# Altium PCB Ultrasonic extern.PcbDoc
Units mm, origin at the board's own origin, x right, y up, seen from the top; angles counter-clockwise.
Board outline 45.59 x 74.3 mm, 2 copper layers (Top Layer, Bottom Layer), stack 1.621 mm thick; 39 components, 52 nets, 175 pads, 7 vias.
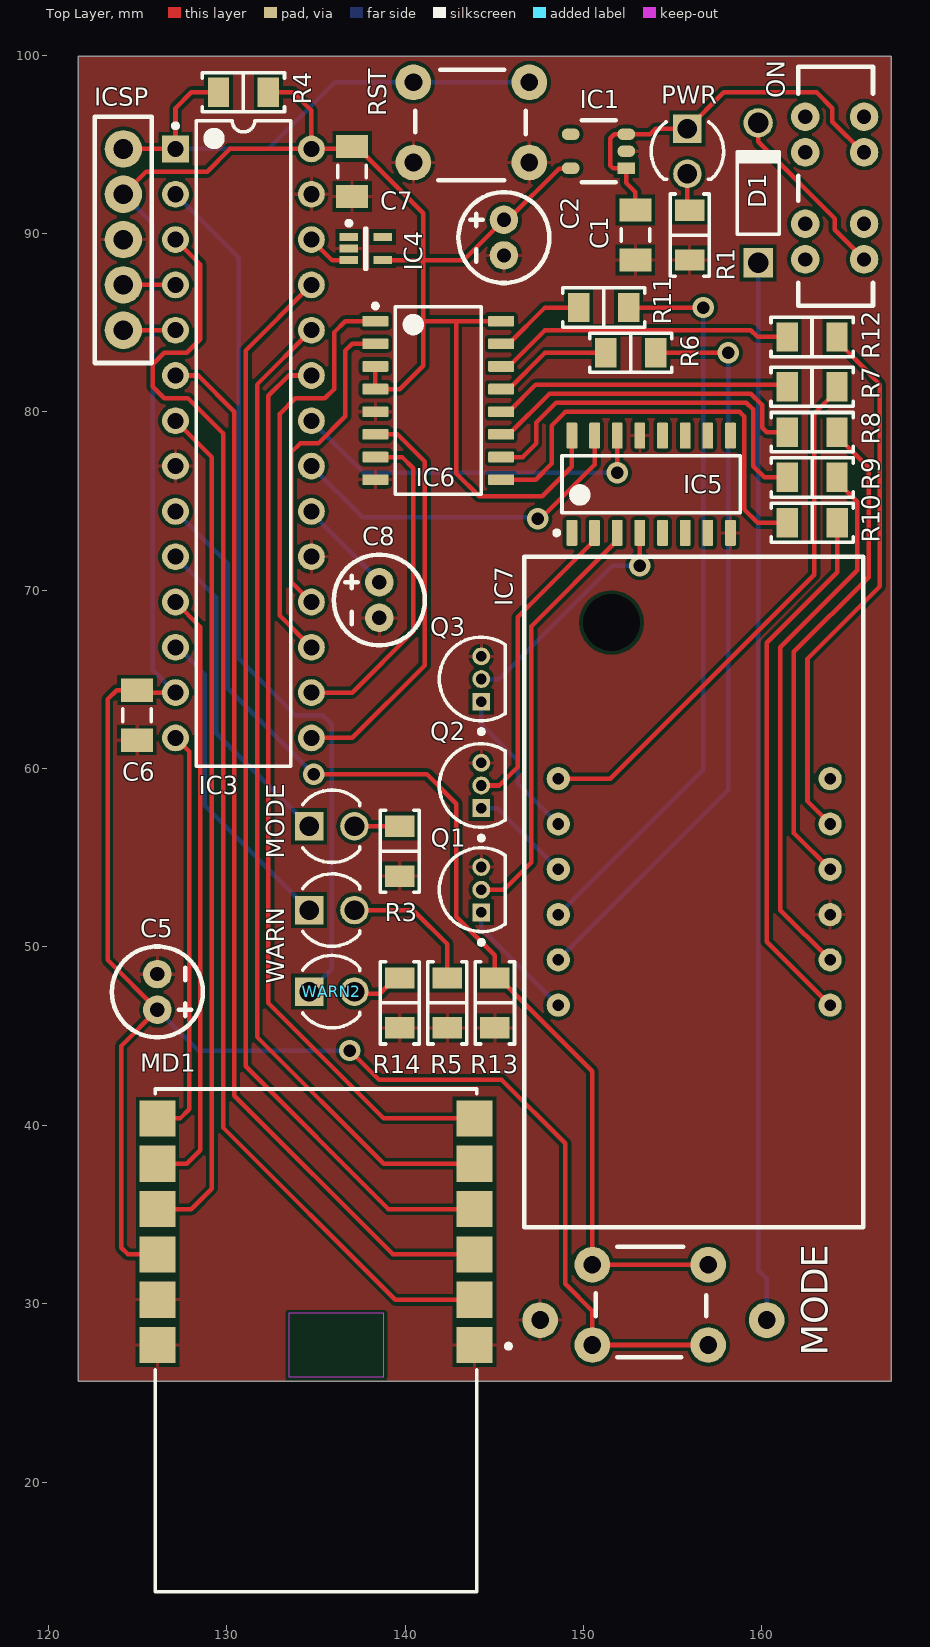
[diagram p0: Top Layer view]
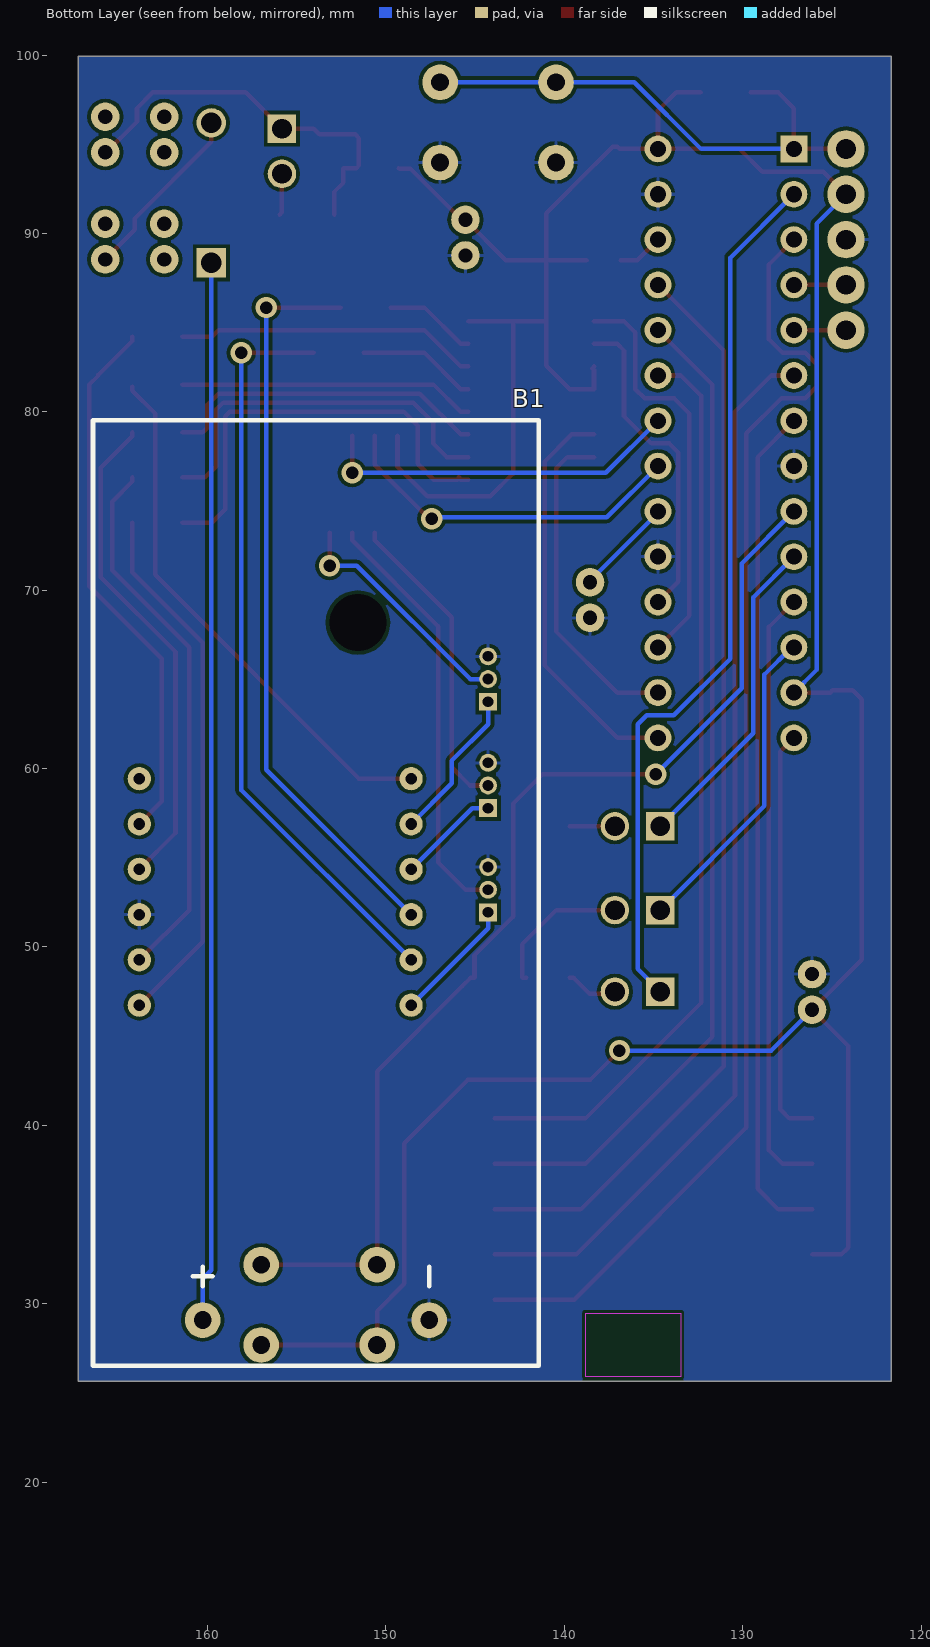
[diagram p1: Bottom Layer view, seen from below]

## Layer stack, top to bottom
Top Solder: solder mask 0.0102, Solder Resist, Dk 3.5
Top Layer: signal copper 0.0356
Dielectric 1: dielectric 1.55, FR-4, Dk 4.8
Bottom Layer: signal copper 0.0356
Bottom Solder: solder mask 0.0102, Solder Resist, Dk 3.5

## Board outline
121.666,25.654 167.259,25.654 167.259,99.949 121.666,99.949

## Design rules (kind name [scope] priority, off if disabled: settings)
BoardOutlineClearance [All] p1 off: gap=0.25 ignorepadtopadclearanceinfootprint=FALSE except(0: Arc-SplitContinuation Track-SplitContinuation SMDPad-SplitContinuation THPad-SplitContinuation Via-SplitContinuation Fill-SplitContinuation Poly-SplitContinuation Region-SplitContinuation Text-SplitContinuation)
Clearance Clearance-xPP-xTP-xTT [All] p1: gap=0.2 ignorepadtopadclearanceinfootprint=FALSE except(0: Arc-Hole Track-Hole SMDPad-Hole THPad-Hole Via-Hole Fill-Hole Poly-Hole Region-Hole Text-Hole; 0.25: Arc-Arc Arc-Track Track-Track)
ComponentClearance [All] p1: gap=0.25 collisioncheckmode=3 verticalgap=0.25 showdistances=FALSE
DiffPairsRouting [All] p1: maxlimit=0.25 minlimit=0.25 mostfreqgap=0.25 toplayer_minwidth=0.381 toplayer_maxwidth=0.381 toplayer_prefwidth=0.381 bottomlayer_minwidth=0.381 bottomlayer_maxwidth=0.381 bottomlayer_prefwidth=0.381 maxuncoupledlength=12.5
Height [All] p1: minheight=0 maxheight=25 prefheight=12.5
HoleSize HoleSize-PTH [All] p1: absolutevalues=TRUE maxlimit=5 minlimit=0.25 maxpercent=80.000 minpercent=20.000
HoleToHoleClearance [All] p1: gap=0.35 allowstackedmicrovias=TRUE
MinimumAnnularRing "Minimum IAR  >0.45mm" [((ObjectKind = 'Pad') OR (ObjectKind = 'Via')) And (Layer = 'MultiLayer') And (HoleDiameter > AsMM(0.45))] p1: minimumring=0.175 // minimum inner annular ring for pads > 0.45mm finished hole size
MinimumAnnularRing "Minimum IAR <=0.45mm" [((ObjectKind = 'Pad') OR (ObjectKind = 'Via')) And (Layer = 'MultiLayer') And (HoleDiameter <= AsMM(0.45))] p2: minimumring=0.175 // minimum inner annular ring for pads <= 0.45mm finished hole size
MinimumSolderMaskSliver [All] p1: minsoldermaskwidth=0.08
PlaneClearance PlaneClearance-IPI [All] p1: clearance=0.25
PlaneConnect [All] p1: planeconnectstyle=Relief reliefexpansion=0.175 reliefentries=4 reliefconductorwidth=0.2 reliefairgap=0.2
PolygonConnect PolygonConnect-xTW [All] p1: connectstyle=Relief reliefconductorwidth=0.2 reliefentries=4 polygonreliefangle="90 Angle" airgapwidth=0.2
RoutingCorners [All] p1: cornerstyle=45-Degree minsetback=2.5 maxsetback=2.5
RoutingVias "RoutingVias > 0.45mm" [(ObjectKind = 'Via') And (HoleDiameter > AsMM(0.45))] p1: holewidth=0.5 width=0.85 viastyle="Through Hole" minholewidth=0.5 minwidth=0.85 maxholewidth=0.9 maxwidth=1.25 // finishet hole size > 0.45mm
RoutingVias "RoutingVias <= 0.45mm" [(ObjectKind = 'Via') And (HoleDiameter <= AsMM(0.45))] p2: holewidth=0.3 width=0.65 viastyle="Through Hole" minholewidth=0.25 minwidth=0.6 maxholewidth=0.45 maxwidth=0.8 // finishet hole size <= 0.45mm
SilkToSilkClearance [All] p1: silktosilkclearance=0.2
SilkToSolderMaskClearance SilkscreenOverComponentPads [IsPad] p1: minsilkscreentomaskgap=0.1 clearancetoexposedcopper=TRUE
SolderMaskExpansion [All] p1: expansion=0 istentingtop=FALSE
UnRoutedNet [All] p1: checkbadconnections=TRUE
Width Width-xTW [All] p1: maxlimit=1.5 minlimit=0.15 preferedwidth=0.2
18 further rules are at their usual default settings.

## Components (designator, comment, footprint, x,y, rotation, side; value= is the part's Value field where it differs from the comment)
B1 "BAT" MP000342 147.574,29.083 r270 bottom
C1 "1uF" 1206 152.908,89.916 r270 top
C2 "100uF" "THT CAP POL 5mm" 145.542,90.773 r270 top
C5 "10uF" "THT CAP POL 5mm" 126.111,46.482 r90 top
C6 "0.1uF" 1206 124.968,62.992 r90 top
C7 "0.1uF" 1206 137.033,93.472 r90 top
C8 "10uF" "THT CAP POL 5mm" 138.557,70.453 r270 top
D1 "1N5817" DIOD-DO-41-P-2 159.79,92.28 r90 top
IC1 "MIC5365-3.3YD5-TR" TSOT-23-5 152.4,93.665 r180 top
IC3 "PIC24FJ64GA002-I/SP" SPDIP300-SP28 130.937,78.232 r0 top
IC4 "MCP9700T-E/LT" SC70-LT5_M 137.795,89.154 r0 top
IC5 "CD4017BM" D0016A_N 153.797,75.946 r90 top
IC6 "CD4511BNSR" NS0016A_L 141.859,80.645 r0 top
IC7 "LT0565SRWK" "7 segment LED display" 163.83,46.736 r90 top
ICSP "ICSP" "5 PIN CON" 124.206,94.742 r270 top (schematic designator J1)
MD1 "MRF89XAM8A-I/RM" FP-MRF89XAM8A-I-RM-0 135.001,27.94 r180 top
MODE "MODE" FSM4JH 150.495,32.186 r0 top (schematic designator SW3)
MODE "MODE" LED-2P-2.54-3MM_V 135.89,56.769 r0 top (schematic designator LED2)
ON "ON-OFF" STSSS2232 162.433,88.551 r90 top (schematic designator SW1)
PWR "PWR" LED-2P-2.54-3MM_V 155.829,94.615 r270 top (schematic designator LED1)
Q1 "BC548CG" ONSC-TO-92-3-29-11 144.272,53.213 r90 top
Q2 "BC548CG" ONSC-TO-92-3-29-11 144.272,59.055 r90 top
Q3 "BC548CG" ONSC-TO-92-3-29-11 144.272,65.024 r90 top
R1 "100" "RES 1206_3216" 155.956,89.916 r90 top value="470 Ohms"
R3 "100" "RES 1206_3216" 139.7,55.372 r90 top value="470 Ohms"
R4 "10k" "RES 1206_3216" 130.937,97.917 r0 top value="10 kOhms"
R5 "100" "RES 1206_3216" 142.367,46.863 r90 top value="470 Ohms"
R6 "100" "RES 1206_3216" 152.654,83.312 r180 top value="470 Ohms"
R7 "100" "RES 1206_3216" 162.814,81.407 r180 top value="470 Ohms"
R8 "100" "RES 1206_3216" 162.817,78.867 r180 top value="470 Ohms"
R9 "100" "RES 1206_3216" 162.817,76.327 r180 top value="470 Ohms"
R10 "100" "RES 1206_3216" 162.82,73.787 r180 top value="470 Ohms"
R11 "100" "RES 1206_3216" 151.13,85.852 r180 top value="470 Ohms"
R12 "100" "RES 1206_3216" 162.814,84.201 r180 top value="470 Ohms"
R13 "1k" "RES 1206_3216" 145.034,46.863 r90 top value="470 Ohms"
R14 "100" "RES 1206_3216" 139.7,46.863 r90 top value="470 Ohms"
RST "RESET" FSM4JH 146.962,93.98 r180 top (schematic designator SW2)
WARN "WARN" LED-2P-2.54-3MM_V 135.89,52.07 r0 top (schematic designator LED3)
WARN2 "WARN" LED-2P-2.54-3MM_V 135.89,47.498 r0 top (schematic designator LED4)

## Footprints (in the part's own frame and the unit in brackets; to place one, negate y for a bottom-side part, rotate by r counter-clockwise, add the part's x,y. Pads: shape width x height; smd on the part's side, far side on the other; paste and mask are expansions set on the pad)
"5 PIN CON" [mm]
  round 2.1 hole 1.1 mask+0.102: 1(0,0) 2(2.54,0) 3(5.08,0) 4(7.62,0) 5(10.16,0)
  silkscreen extent -1.8,-1.6 12,1.6, body extent -1.2,-1.2 11.36,1.2, height 5.5
"7 segment LED display" [mm] "3 digits"
  round 1.3 hole 0.65 mask+0.102: 1(0,0) 2(2.54,0) 3(5.08,0) 4(7.62,0) 5(10.16,0) 6(12.7,0) 7(12.7,15.24) 8(10.16,15.24) 9(7.62,15.24) 10(5.08,15.24) 11(2.54,15.24) 12(0,15.24)
  silkscreen extent -12.45,-1.85 25.15,17.15, body extent -12.55,-1.95 25.25,17.25, height 8.5
1206 [mm] "Chip Resistor, 2-Leads, Body 3.20x1.60mm, IPC Medium Density"
  rect 1.3x1.8 smd: 1(-1.4,0) 2(1.4,0)
  silkscreen extent -0.35,-0.8 0.35,0.8, body extent -1.7,-0.9 1.7,0.9, height 0.9
D0016A_N [mm] "SOIC, 16-Leads, Body 10x4mm, Pitch 1.27mm, IPC Medium Density"
  rrect17% 1.45x0.6 smd: 1(-2.725,4.445) 2(-2.725,3.175) 3(-2.725,1.905) 4(-2.725,0.635) 5(-2.725,-0.635) 6(-2.725,-1.905) 7(-2.725,-3.175) 8(-2.725,-4.445) 9(2.725,-4.445) 10(2.725,-3.175) 11(2.725,-1.905) 12(2.725,-0.635) 13(2.725,0.635) 14(2.725,1.905) 15(2.725,3.175) 16(2.725,4.445)
  silkscreen extent -2.85,-5 1.6,5.42, body extent -3,-4.95 3,4.95, height 1.59
DIOD-DO-41-P-2 [mm] "THD, 2-Leads, Body 4.635x2.36mm, Pin Spacing 7.85mm"
  rect 1.65x1.65 hole 1.15: 1(-3.925,0)
  round 1.65 hole 1.15: 2(3.925,0)
  silkscreen extent -2.32,-1.18 2.32,1.18, body extent -4.36,-1.18 4.36,1.18, height 2.35
FP-MRF89XAM8A-I-RM-0 [mil]
  rect 80x80 smd paste+0 mask+0: 1(-350,10) 2(-350,-90) 3(-350,-190) 4(-350,-290) 5(-350,-390) 6(-350,-490) 7(350,-490) 8(350,-390) 9(350,-290) 10(350,-190) 11(350,-90) 12(350,10)
  Keep-Out Layer region: -150,-60 60,-60 60,80 -150,80
  silkscreen extent -430,-555 355,555, body extent -394,-559 394,559, height 10
FSM4JH [mm] "Tactile switch"
  round 2 hole 1: 1(0,0) 2(6.5,0) 3(0,-4.5) 4(6.5,-4.5)
  silkscreen extent 0.2,-5.2 6.4,1, body extent 0.3,-5.1 6.3,0.9, height 5.5
LED-2P-2.54-3MM_V [mm] "LED, 2-Leads, Dia 3mm, Pitch 2.54mm"
  rect 1.6x1.6 hole 1.1: 1(-1.27,0)
  round 1.6 hole 1.1: 2(1.27,0)
  silkscreen extent -1.64,-2.03 1.57,2.03, body extent -2.06,-2.07 1.6,2.07, height 6.35
MP000342 [mm] "Battery holder 2xAAA"
  round 2 hole 1 mask+0.102: 1(0,0) 2(0,-12.7)
  round 0 hole 3.2 unplated mask+0.102: 3(-39.1,-4)
  silkscreen extent -50.45,-18.85 2.55,6.15, body extent -50,-18.5 2,5.5, height 12
NS0016A_L [mm] "SOIC,16-Leads,Body 10.5x5.6mm,Pitch 1.27mm,IPC High Density"
  rrect17% 1.45x0.6 smd: 1(-3.525,4.445) 2(-3.525,3.175) 3(-3.525,1.905) 4(-3.525,0.635) 5(-3.525,-0.635) 6(-3.525,-1.905) 7(-3.525,-3.175) 8(-3.525,-4.445) 9(3.525,-4.445) 10(3.525,-3.175) 11(3.525,-1.905) 12(3.525,-0.635) 13(3.525,0.635) 14(3.525,1.905) 15(3.525,3.175) 16(3.525,4.445)
  silkscreen extent -3.65,-5.25 2.4,5.42, body extent -2.8,-5.25 2.8,5.25, height 2
ONSC-TO-92-3-29-11 [mm] "TO, 3-Leads, Body Dia 4.7mm, Pitch 1.27mm"
  rect 1x1 hole 0.6: 1(-1.27,0)
  round 1 hole 0.6: 2(0,0) 3(1.27,0)
  silkscreen extent -3.07,-1.34 2.35,2.35, body extent -2.35,-1.33 2.36,2.36, height 7.87
"RES 1206_3216" [mm] "Chip Resistor, 2-Leads, Body 3.13x1.55mm, IPC Medium Density"
  rect 1.2x1.65 smd: 1(-1.4,0) 2(1.4,0)
  silkscreen extent -2.3,-1.1 2.3,1.1, body extent -1.57,-0.8 1.62,0.8, height 0.6
SC70-LT5_M [mm] "SOT353, 5-Leads, Body 2x1.3mm, Pitch 0.65mm, Lead Span 2.1mm, IPC Low Density"
  rect 1.05x0.45 smd: 1(-0.95,0.65) 2(-0.95,0) 3(-0.95,-0.65) 4(0.95,-0.65) 5(0.95,0.65)
  silkscreen extent -1.07,-1.15 0.05,1.55, body extent -0.67,-1.12 0.68,1.13, height 1.1
SPDIP300-SP28 [mm] "DIP, 28-Pin, Row Spacing 7.62 mm, Pitch 2.54 mm"
  rect 1.5x1.5 hole 0.9: 1(-3.81,16.51)
  round 1.5 hole 0.9: 2(-3.81,13.97) 3(-3.81,11.43) 4(-3.81,8.89) 5(-3.81,6.35) 6(-3.81,3.81) 7(-3.81,1.27) 8(-3.81,-1.27) 9(-3.81,-3.81) 10(-3.81,-6.35) 11(-3.81,-8.89) 12(-3.81,-11.43) 13(-3.81,-13.97) 14(-3.81,-16.51) 15(3.81,-16.51) 16(3.81,-13.97) 17(3.81,-11.43) 18(3.81,-8.89) 19(3.81,-6.35) 20(3.81,-3.81) 21(3.81,-1.27) 22(3.81,1.27) 23(3.81,3.81) 24(3.81,6.35) 25(3.81,8.89) 26(3.81,11.43) 27(3.81,13.97) 28(3.81,16.51)
  silkscreen extent -3.93,-18.1 2.65,18.1, body extent -3.55,-18.1 3.55,18.1, height 5.33
STSSS2232 [mm] "Slide switch 3POS"
  round 1.6 hole 0.8 mask+0.102: 1(0,-3.3) 2(2,-3.3) 3(6,-3.3) 4(8,-3.3) 5(0,0) 6(2,0) 7(6,0) 8(8,0)
  silkscreen extent -2.6,-3.8 10.8,0.4, body extent -2.4,-5.4 10.6,0.3, height 3.5
"THT CAP POL 5mm" [mm]
  round 1.6 hole 0.8 mask+0.102: 1(0,0) 2(2,0)
  silkscreen extent -1.55,-2.55 3.55,2.55, body extent -1.5,-2.5 3.5,2.5, height 8.5
TSOT-23-5 [mm]
  rect 1x0.66 smd: 1(0,0)
  oval 1x0.66 smd: 2(0,-0.95) 3(0,-1.9) 4(3.115,-1.9) 5(3.115,0)
  silkscreen extent 0.6,-2.7 2.5,0.8, body extent 0.65,-2.4 2.45,0.5, height 1

## Part data
B1: "Battery holder 3xAAA"
C1 C6 C7: library part CAP, "Capacitor ceramic"
C2 C5 C8: library part "CAP POL", "aluminium electrolytic capacitor"
D1: library part CMP-2000-05521-1, "Schottky Barrier Rectifier, 1 A, 20 V, -65 to 125 degC, 2-Pin DO-41, RoHS, Tape and Reel", If - Forward Current=1A, Ifsm - Forward Surge Current=25A, Ir - Reverse Current=1000uA, Manufacturer=DiodesIncorporated, Maximum Operating Temperature=+125C, Minimum Operating Temperature=-65C, Operating Temperature Range=-65Cto+125C, Package / Case=DO-41, Package Description="2-Pin Through Hole Device, Body 4.635 x 2.36 mm, Pin Spacing 7.85 mm", Package Reference=DO-41-P-2, Vf - Forward Voltage=0.75Vat3A, Vrrm - Repetitive Reverse Voltage=20V, Brand=DiodesIncorporated, Configuration=Single, Datasheet URL=http://www.diodes.com/_files/datasheets/ds23001.pdf, Datasheet Version="Rev. 8-2, 05/2009", Factory Pack Quantity=5000, Height=2.72mm, Length=5.21mm, Manufacturer URL=http://www.diodes.com/, Mounting Style=ThroughHole, Mounting Technology=ThroughHole, Packaging=Reel, Product=SchottkyRectifiers, Product Category=SchottkyDiodes&Rectifiers, RoHS=True, Series=1N58, Technology=Si, Termination Style=ThroughHole, Type=SchottkyDiode, Unit Weight=0.010582oz, Width=2.72mm
IC1: "LDO Voltage regulator 2.5V-5.5V in 3.3V out"
IC3: library part CMP-0046-00003-2, "General Purpose 16-Bit Flash Microcontroller, 64KB Flash, 8KB SRAM, 28-Pin SPDIP, Industrial Temperature", ComponentLink1Description=Datasheet, ComponentLink1URL=http://ww1.microchip.com/downloads/en/DeviceDoc/39881D.pdf, ComponentLink2Description="Packaging Specification", ComponentLink2URL=http://www.microchip.com/stellent/groups/techpub_sg/documents/packagingspec/en012702.pdf, ComponentLink3Description="Microchip.com Home", ComponentLink3URL=http://www.microchip.com/, DatasheetVersion="revD, Feb-2010", PackageDescription="28-Lead Skinny Plastic Dual In-Line (SP) - 300 mil Body [SPDIP]", PackageReference=SPDIP300-SP28, PackageVersion="revBB, Aug-2009", RevisionNote="Component URLs added."
IC4: library part CMP-0192-00174-1, "Low-Power Linear Active Thermistor IC, 5-Pin SC-70, Extended Temperature, Tape and Reel", Code_IPC=SOT353-5, DatasheetVersion="revE, Apr-2009", PackageDescription="5-Lead Plastic Small Outline Transistor (LT) [SC70]", PackageReference=SC70-LT5, PackageVersion="revBB, Aug-2009"
IC5: library part CMP-1623-00071-2, "CMOS Decade Counter with 10 Decoded Outputs, D0016A, TUBE", F @ Nom Voltage(Max)(Mhz)=8, Generic Part Number=CD4017B, ICC @ Nom Voltage(Max)(mA)=0.03, Manufacturer="Texas Instruments", Operating Temperature Range(C)="-55 to 125", Rating=Military, tpd @ Nom Voltage(Max)(ns)=270, Voltage(Nom)(V)=10, Bits(#)=10, Code_JEDEC="MS-012 variation AC", DatasheetVersion=SCHS027C, Function=Counter, Input Type=CMOS, Inputs=1, Output Drive (IOL/IOH)(Max)(mA)=1.5/-1.5, Output Type=CMOS, PackageReference=D0016A, Schmitt Trigger=No, Technology Family=CD4000, Type=Decade, VCC(Max)(V)=18, VCC(Min)(V)=3
IC6: library part CMP-0388-00338-2, "CMOS BCD-to-7-Segment LED Latch / Decoder / Driver, 3 to 18 V, -55 to 125 degC, 16-pin SOP (NS16), Green (RoHS & no Sb/Br)", Manufacturer="Texas Instruments", Rating=Military, ComponentLink1Description="Manufacturer URL", ComponentLink1URL=http://www.ti.com/, ComponentLink2Description=Datasheet, ComponentLink2URL=http://www.ti.com/general/docs/lit/getliterature.tsp?genericPartNumber=CD4511B&fileType=pdf, ComponentLink3Description="Package Specification", ComponentLink3URL=http://www.ti.com/litv/pdf/msop002a, DatasheetVersion=SCHS072B, Eco-Plan="Green (RoHS & no Sb/Br)", Mounting Technology="Surface Mount", PackageDescription="16-Pin Plastic Small Outline, Body 10.20 x 5.30 mm, Pitch 1.27 mm", PackageReference=NS0016A, PackageVersion=4040062/C, PartNumber=CD4511BNSR, SubFamily="Discrete Segment LED Driver", Vin(Max)(V)=18, Vin(Min)(V)=3
IC7: "7 segment LED red display, 3 digit, common cathode, 2.5V forward, 20mA"
ICSP: library part "5 PIN CON", "ICSP programming pins"
MD1: library part CMP-06331-000001-1, "RF TXRX MOD ISM<1GHZ TRACE ANT", Ambient Temperature Range High=+85°C, Ambient Temperature Range Low=-40°C, Manufacturer=Microchip, Max Frequency=870MHz, Max Supply Voltage=3.6V, Min Supply Voltage=2.1V, Nominal Supply Current=1.3mA, Receiving Current=3mA, Temperature="-40°C to +85°C", Transmitting Current=25mA, Automotive=No, Bandwidth=7MHz, Category=UNK, ComponentLink2Description=Datasheet, ComponentLink2URL=http://ww1.microchip.com/downloads/en/DeviceDoc/70651A.pdf, Data Rate=40kbits/s, Device Class L1="Integrated Circuits (ICs)", Device Class L2="RF Semiconductors and Devices", Device Class L3=Transceivers, Digikey Description="RF TXRX MOD ISM<1GHZ TRACE ANT", Height=0.075inch, Interface=SPI, Lead Free=Yes, Manufacturer Part Number=MRF89XAM8A-I/RM, Mouser Description="RF Modules 868MHz Sub-GHz transceiver module", Octopart=https://octopart.com/mrf89xam8a-i%2Frm-microchip-18902547, Package=MRF89XAM8A-I/RM, RoHS=TRUE, Temperature Range High=+85°C, Temperature Range Low=-40°C
MODE RST: library part SW_TACT, "TACT SW, 50mA, 24V"
MODE PWR: library part CMP-2000-05186-1, "Green Diffused LED, 2.1 V, 20 mA forward, -40 to 85 degC, 2-Pin THD, RoHS", Color=Green, Dominant Wavelength/Color Temperature=569nm, Manufacturer=Avago, Package=2T-1, Category=LEDs, Datasheet URL=https://datasheet.ciiva.com/11773/0900766b800204ad-11773539.pdf, Datasheet Version=Jul-14, Intensity=2.3mcd, Lens Appearance=ColoredDiffused, Lens Shape Type=Circular, Manufacturer URL=http://www.avagotech.com/, Mounting=ThroughHole, Mounting Orientation=TopMount, Number of LEDs=1, Packaging=Bulk, Peak Wavelength=565nm, Pin Count=2, Rad Hard=No, Type=Uni-Color, Viewing Angle=50deg
ON: library part STSSS2232, "Sliding switch, 3-POS  DP3T, 3 A, 18 V"
Q1 Q2 Q3: library part CMP-1048-01453-1, "Amplifier Transistor, NPN Silicon, 3-Pin TO-92, Pb-Free, Bulk Box", Manufacturer="On Semiconductor", ComponentLink1Description="Manufacturer URL", ComponentLink1URL=http://www.onsemi.com/, ComponentLink2Description=Datasheet, ComponentLink2URL=http://www.onsemi.com/pub_link/Collateral/BC546-D.PDF, ComponentLink3Description="Package Specification", ComponentLink3URL=http://www.onsemi.cn/pub_link/Collateral/2N6426-D.PDF, DatasheetVersion="Rev. 7", fT Min (MHz)=150, IC Continuous (A)=0.1, Mounting Technology="Through Hole", PackageDescription="3-Pin Transistor Outline, Body 4.825 x 3.685 mm, Pitch 1.27 mm", PackageReference=TO-92-3-29-11_AM_SL, PackageVersion="Rev. AM", Packing="Bulk Box", PartNumber=BC548CG, Polarity=NPN, RoHS=TRUE
R1 R3 R5 R6 R7 R8 R9 R10 R11 R12 R13 R14: library part CRG1206F470R, "RES SMD 470 OHM 1% 1/4W 1206", Device Package="1206 (3216 Metric)", Manufacturer="TE Connectivity Passive Product", Operating Temperature="-55°C ~ 155°C", Power (Watts)="0.25W, 1/4W", Resistance="470 Ohms", Supplier Device Package=1206, Supplier Part Number 1=A106077CT-ND, Temperature Coefficient=±100ppm/°C, Tolerance=±1%, ComponentLink1Description=Datasheet, ComponentLink1URL=https://www.te.com/commerce/DocumentDelivery/DDEController?Action=srchrtrv&DocNm=1773204&DocType=DS&DocLang=English, ComponentLink2Description="DigiKey Link", ComponentLink2URL=http://digikey.com/product-detail/en/te-connectivity-passive-product/CRG1206F470R/A106077CT-ND/3477734, Composition="Thick Film", Height - Seated (Max)="0.026\" (0.65mm)", LastUpdated="2020-09-02 01:13:10", Lifecycle Status=Active, Minimum Order=1, Number of Terminations=2, Package / Case="1206 (3216 Metric)", Packaging=TapeAndReel, Part Number=CRG1206F470R, Part Status=Active, PartId=26990, Price=0.01, Series="CRG, Neohm", Size / Dimension="0.122\" L x 0.061\" W (3.10mm x 1.55mm)", Supplier 1=DigiKey
R4: library part CRG1206F10K, "RES SMD 10K OHM 1% 1/4W 1206", Device Package="1206 (3216 Metric)", Manufacturer="TE Connectivity Passive Product", Operating Temperature="-55°C ~ 155°C", Power (Watts)="0.25W, 1/4W", Resistance="10 kOhms", Supplier Device Package=1206, Supplier Part Number 1=A106069CT-ND, Temperature Coefficient=±100ppm/°C, Tolerance=±1%, ComponentLink1Description=Datasheet, ComponentLink1URL=https://www.te.com/commerce/DocumentDelivery/DDEController?Action=srchrtrv&DocNm=1773204&DocType=DS&DocLang=English, ComponentLink2Description="DigiKey Link", ComponentLink2URL=http://digikey.com/product-detail/en/te-connectivity-passive-product/CRG1206F10K/A106069CT-ND/3477720, Composition="Thick Film", Height - Seated (Max)="0.026\" (0.65mm)", LastUpdated="2020-09-02 01:13:10", Lifecycle Status=Active, Minimum Order=1, Number of Terminations=2, Package / Case="1206 (3216 Metric)", Packaging=TapeAndReel, Part Number=CRG1206F10K, Part Status=Active, PartId=26989, Price=0.01, Series="CRG, Neohm", Size / Dimension="0.122\" L x 0.061\" W (3.10mm x 1.55mm)", Supplier 1=DigiKey
WARN WARN2: library part CMP-2000-05186-1, "Red Diffused LED, 2.1 V, 20 mA forward, -40 to 85 degC, 2-Pin THD, RoHS", Color=Green, Dominant Wavelength/Color Temperature=569nm, Manufacturer=Avago, Package=2T-1, Category=LEDs, Datasheet URL=https://datasheet.ciiva.com/11773/0900766b800204ad-11773539.pdf, Datasheet Version=Jul-14, Intensity=2.3mcd, Lens Appearance=ColoredDiffused, Lens Shape Type=Circular, Manufacturer URL=http://www.avagotech.com/, Mounting=ThroughHole, Mounting Orientation=TopMount, Number of LEDs=1, Packaging=Bulk, Peak Wavelength=565nm, Pin Count=2, Rad Hard=No, Type=Uni-Color, Viewing Angle=50deg

## Via types
v1: diameter 1.2, hole 0.7, Top Layer to Bottom Layer, 7 vias

## Nets (pads, with @x,y where several pads share a name; then routed paths per layer and width w, separated by ;. In a path a pad name is that pad's centre, name@x,y a point inside that pad or via, vN(x,y) a via of type N, cw(c..) or ccw(c..) an arc to the next point about the centre after c; other vN are vias at no path point)
3V3: C2.1 C5.1 C6.2 C7.2 IC1.5 IC3.13 IC3.28 IC4.4 IC5.16 IC6.3 IC6.4 IC6.16 ICSP.2 MD1.10 MODE.3 MODE.4 R4.2 | length 185.4
  Top Layer w0.254: ICSP.2 125.476,93.472 128.905,93.472 130.175,94.742 IC3.28 ; MD1.10 124.46,32.766 124.079,33.147 124.079,44.45 C5.1 123.317,49.276 123.317,63.881 123.828,64.392 C6.2 125.098,64.262 IC3.13 IC3.13@127.254,64.262 ; R4.2 133.731,97.917 134.747,96.901 IC3.28 ; v1(136.906,44.196) 138.557,42.545 145.415,42.545 148.971,38.989 148.971,31.115 150.495,29.591 MODE.3 MODE.4 ; 138.302,93.853 137.283,94.872 C7.2 136.903,94.742 IC3.28 ; 138.303,93.853 141.009,91.147 141.009,88.504 ; IC6.3 138.334,82.519 138.43,82.423 138.38,82.423 138.334,82.377 IC6.4 139.7,81.28 141.009,82.589 141.009,85.09 ; IC4.4 141.009,88.504 ; IC6.16 142.875,85.09 ; IC1.5 149.266,93.646 148.637,93.646 145.764,90.773 C2.1 143.273,88.504 141.009,88.504 ; IC5.16 149.352,76.932 147.69,75.27 144.15,75.27 142.875,76.545 142.875,85.09 ; 141.009,85.09 142.875,85.09 ; 141.009,85.09 141.009,88.504
  Bottom Layer w0.254: ICSP.2 125.857,90.551 125.857,65.532 IC3.13 ; C5.1 128.397,44.196 v1(136.906,44.196) ; IC3.28@134.62,94.742 IC3.28
"7SEG RST": IC3.21 IC5.15 | length 20
  Top Layer w0.254: v1(147.44,74.02) 147.6,74.02 150.622,77.042 IC5.15
  Bottom Layer w0.254: IC3.21 137.619,74.09 147.37,74.09 v1(147.44,74.02)
a: IC6.13 R6.2 | length 6.7
  Top Layer w0.254: IC6.13 145.809,81.28 147.841,83.312 R6.2
b: IC6.12 R7.2 | length 16.7
  Top Layer w0.254: IC6.12 145.809,80.01 147.333,81.534 R7.2@161.414,81.534
c: IC6.11 R8.2 | length 18.6
  Top Layer w0.254: IC6.11 145.809,78.74 148.095,81.026 159.385,81.026 160.02,80.391 160.02,79.121 160.274,78.867 R8.2
"CNTR CLK": IC3.22 IC5.14 | length 20.4
  Top Layer w0.254: v1(151.892,76.581) IC5.14
  Bottom Layer w0.254: IC3.22 137.668,76.581 v1(151.892,76.581)
d: IC6.10 R9.2 | length 21.6
  Top Layer w0.254: IC6.10 146.59,77.47 147.35,78.23 147.35,79.405 148.463,80.518 159.132,80.518 159.512,80.138 159.512,76.962 160.147,76.327 R9.2
e: IC6.9 R10.2 | length 24.6
  Top Layer w0.254: IC6.9 145.796,76.2 145.923,76.327 145.923,76.259 145.982,76.2 147.32,76.2 148.209,77.089 148.209,79.229 148.99,80.01 158.75,80.01 159.004,79.756 159.004,74.549 159.766,73.787 R10.2
f: IC6.15 R11.2 | length 5.2
  Top Layer w0.254: IC6.15 145.809,83.82 147.841,85.852 R11.2
g: IC6.14 R12.2 | length 17
  Top Layer w0.254: IC6.14 145.809,82.55 147.841,84.582 159.385,84.582 159.766,84.201 R12.2
GND: B1.1 C1.2 C2.2 C5.2 C6.1 C7.1 C8.2 IC1.2 IC3.8 IC3.19 IC3.27 IC4.2 IC5.8 IC5.13 IC6.5 IC6.8 IC7.3 ICSP.3 MD1.1 MD1.11 MD1.12 Q1.3 Q2.3 Q3.3 R1.1 R3.1 R5.1 R13.1 R14.1 RST.1 RST.2
"LED A": IC3.16 IC6.7 | length 18.7
  Top Layer w0.254: IC3.16 137.033,64.262 140.462,67.691 140.462,76.835 139.827,77.47 IC6.7
"LED B": IC3.17 IC6.1 | length 23.2
  Top Layer w0.254: IC3.17 132.983,68.566 132.983,79.897 133.847,80.761 135.498,80.761 136.017,81.28 136.017,84.455 136.652,85.09 IC6.1
"LED C": IC3.18 IC6.2 | length 18.3
  Top Layer w0.254: IC3.18 133.604,70.485 133.604,77.724 134.112,78.232 135.128,78.232 136.652,79.756 136.652,83.439 137.033,83.82 IC6.2
"LED D": IC3.15 IC6.6 | length 22.9
  Top Layer w0.254: IC3.15 137.033,61.722 141.097,65.786 141.097,77.216 139.573,78.74 IC6.6
MCLR: IC3.1 ICSP.1 R4.1 RST.3 RST.4 | length 29.4
  Top Layer w0.254: ICSP.1 IC3.1 127.127,97.028 128.016,97.917 R4.1
  Bottom Layer w0.254: IC3.1 132.334,94.742 136.072,98.48 RST.4 RST.3
MISO: IC3.14 MD1.7 | length 23.1
  Top Layer w0.254: MD1.7 127.381,40.386 127.889,40.894 127.889,60.96 IC3.14
MOSI: IC3.24 MD1.5 | length 56
  Top Layer w0.254: IC3.24 131.699,81.534 131.699,44.958 138.811,37.846 MD1.5
nCS: IC3.11 MD1.8 | length 34
  Top Layer w0.254: MD1.8 127.762,37.846 128.524,38.608 128.524,67.945 IC3.11
nCSCON: IC3.6 MD1.3 | length 59.6
  Top Layer w0.254: IC3.6 128.397,82.042 130.429,80.01 130.429,41.656 139.319,32.766 MD1.3
NetB1_2: B1.2 D1.1 | length 59.7
  Bottom Layer w0.254: D1.1@159.79,88.594 159.79,31.88 160.274,31.396 B1.2
NetC1_1: C1.1 IC1.1 IC1.3 ON.3 PWR.1 | length 22.4
  Top Layer w0.254: C1.1@152.908,91.062 152.908,92.329 152.4,92.837 IC1.1 151.66,93.665 151.511,93.814 151.511,95.346 151.73,95.565 IC1.3 153.731,95.565 154.051,95.885 PWR.1 157.861,97.917 163.068,97.917 163.957,97.028 163.957,96.266 165.672,94.551 ON.3
NetC8_1: C8.1 IC3.20 | length 5.7
  Top Layer w0.254: IC3.20@134.747,74.343 IC3.20 ; C8.1@138.43,70.58 C8.1 C8.1@138.557,70.533
  Bottom Layer w0.254: IC3.20@134.747,74.343 C8.1@138.557,70.533
NetD1_2: D1.2 ON.1 | length 10.1
  Top Layer w0.254: D1.2 159.79,95.14 164.09,90.84 164.09,90.21 165.733,88.567 ON.1
NetIC3_2: IC3.2 WARN2.1 | length 49.8
  Bottom Layer w0.254: IC3.2 130.683,88.646 130.683,66.167 133.858,62.992 135.382,62.992 135.89,62.484 135.89,48.768 WARN2.1
NetIC3_9: IC3.9 MODE.1@150.495,32.186 MODE.2@156.995,32.186 R13.2 | length 62.3
  Top Layer w0.254: v1(134.874,59.69) 141.224,59.69 142.875,58.039 142.875,51.689 145.034,49.53 R13.2 145.259,48.263 145.732,47.79 150.495,43.027 150.495,32.186 MODE.2@156.995,32.186
  Bottom Layer w0.254: IC3.9 130.048,71.501 130.048,64.516 v1(134.874,59.69)
NetIC3_10: IC3.10 MODE.1@134.62,56.769 | length 18.2
  Bottom Layer w0.254: IC3.10 129.413,69.596 129.413,61.976 MODE.1@134.62,56.769
NetIC3_12: IC3.12 WARN.1 | length 17.9
  Bottom Layer w0.254: IC3.12 127.254,66.802 128.778,65.278 128.778,57.912 WARN.1
NetIC5_2: IC5.2 Q2.2 | length 17.4
  Top Layer w0.254: Q2.2 145.288,59.055 146.304,60.071 146.304,68.478 150.622,72.796 IC5.2
NetIC5_3: IC5.3 Q1.2 | length 23.9
  Top Layer w0.254: Q1.2 145.542,53.213 147.066,54.737 147.066,67.97 151.892,72.796 IC5.3
NetIC5_4: IC5.4 Q3.2 | length 13.4
  Top Layer w0.254: v1(153.162,71.374) IC5.4
  Bottom Layer w0.254: Q3.2 145.28,65.024 151.63,71.374 v1(153.162,71.374)
NetIC7_1: IC7.1 R10.1 | length 30.2
  Top Layer w0.254: IC7.1 160.274,50.292 160.274,67.056 164.22,71.002 R10.1
NetIC7_2: IC7.2 R9.1 | length 30.5
  Top Layer w0.254: IC7.2 161.036,52.07 161.036,66.802 165.354,71.12 165.354,74.965 164.217,76.102 R9.1
NetIC7_4: IC7.4 R8.1 | length 27.8
  Top Layer w0.254: IC7.4 161.798,56.388 161.798,66.548 165.989,70.739 165.989,76.87 164.217,78.642 R8.1
NetIC7_5: IC7.5 R12.1 | length 30.5
  Top Layer w0.254: IC7.5 162.56,58.166 162.56,66.167 166.624,70.231 166.624,81.534 166.116,82.042 166.116,82.074 164.214,83.976 R12.1
NetIC7_7: IC7.7 R7.1 | length 30.2
  Top Layer w0.254: IC7.7 151.511,59.436 162.941,70.866 162.941,79.909 164.214,81.182 R7.1
NetIC7_8: IC7.8 Q3.1 | length 8.6
  Bottom Layer w0.254: Q3.1 144.272,62.484 146.304,60.452 146.304,59.182 IC7.8
NetIC7_9: IC7.9 Q2.1 | length 5.7
  Bottom Layer w0.254: Q2.1 145.161,57.785 IC7.9
NetIC7_10: IC7.10 R11.1 | length 41.6
  Top Layer w0.254: R11.1 v1(156.718,85.852)
  Bottom Layer w0.254: IC7.10 156.718,59.944 v1(156.718,85.852)
NetIC7_11: IC7.11 R6.1 | length 42
  Top Layer w0.254: R6.1 v1(158.115,83.312)
  Bottom Layer w0.254: IC7.11 158.115,58.801 v1(158.115,83.312)
NetIC7_12: IC7.12 Q1.1 | length 7
  Bottom Layer w0.254: Q1.1 144.272,51.054 IC7.12
NetLED1_2: PWR.2 R1.2 | length 2.3
  Top Layer w0.254: PWR.2 155.829,91.189 R1.2@155.956,91.062
NetLED2_2: MODE.2@137.16,56.769 R3.2 | length 2.5
  Top Layer w0.254: MODE.2@137.16,56.769 139.697,56.769 R3.2
NetLED3_2: R5.2 WARN.2 | length 8.1
  Top Layer w0.254: WARN.2 140.462,52.07 142.367,50.165 R5.2 R5.2@142.142,48.263
NetLED4_2: R14.2 WARN2.2 | length 3
  Top Layer w0.254: WARN2.2 137.287,47.371 138.583,47.371 139.475,48.263 R14.2
PGEC: IC3.5 ICSP.5 | length 2.9
  Top Layer w0.254: ICSP.5 IC3.5
PGED: IC3.4 ICSP.4 | length 2.9
  Top Layer w0.254: ICSP.4 IC3.4
"RF IRQ0": IC3.25 MD1.4 | length 61.5
  Top Layer w0.254: IC3.25 131.064,83.439 131.064,43.307 139.065,35.306 MD1.4
"RF IRQ1": IC3.7 MD1.9 | length 47.4
  Top Layer w0.254: MD1.9 128.016,35.306 129.159,36.449 129.159,77.47 IC3.7
"RF RST": IC3.3 MD1.2 | length 72.7
  Top Layer w0.254: IC3.3 128.524,88.265 128.524,84.074 127.762,83.312 126.492,83.312 125.857,82.677 125.857,81.407 126.492,80.772 127.826,80.772 129.794,78.804 129.794,39.878 139.446,30.226 MD1.2
SCLK: IC3.23 MD1.6 | length 51.2
  Top Layer w0.254: IC3.23 133.477,82.042 132.334,80.899 132.334,46.863 138.811,40.386 MD1.6
TEMP: IC3.26 IC4.3 | length 2.6
  Top Layer w0.254: IC3.26 135.905,88.504 IC4.3
pads on no net: B1.3 IC1.4 IC4.1 IC4.5 IC5.1 IC5.5 IC5.6 IC5.7 IC5.9 IC5.10 IC5.11 IC5.12 IC7.6 ON.2 ON.4 ON.5 ON.6 ON.7 ON.8

## Polygon pours and split planes (outlines as drawn)
GND on Top Layer "TOP" (solid, pour order 0): 121.666,25.654 167.259,25.654 167.259,99.949 121.666,99.949
GND on Bottom Layer "BOTTOM" (solid, pour order 1): 121.666,99.949 121.666,25.654 167.259,25.654 167.259,99.949

## Silkscreen, mask and mechanical layers (free items; w line width, h text height)
Mechanical 1:
  lines w0.2: 121.66,25.66 121.66,99.95 167.26,99.95 167.26,25.65 121.67,25.65
  lines w0.254: 121.66,25.66 121.66,25.66